# EAGLE board Avalon16 (EAGLE 6.3)

Size 160 x 100 mm. Coordinates in mm from the lower left corner, seen from the top.
Outline: 0,0 160,0 160,100 0,100 0,0
Copper layers (1*16): Top 0.035mm / dielectric 1.5mm / Bottom 0.035mm
Design rules "default": minimum track width 10mil, minimum drill 24mil, track to track 8mil, track to pad 8mil, pad to pad 8mil, via to via 8mil, smd to smd 8mil, copper to edge 40mil, drill to drill 8mil, minimum pad ring 10mil, minimum via ring 8mil, stop-mask expansion 4mil, vias tented up to drill 0mil, thermal gap 10mil

## Footprints (pad centres in the part's own frame; a part is rotated, then mirrored left to right if it is on the bottom)
C0805 = smd 1.3 x 1.5: 1 -0.95,0; 2 0.95,0
PANASONIC_F = smd 4 x 1.6: + 3.55,0; - -3.55,0
C0603 = smd 1.1 x 1: 1 -0.85,0; 2 0.85,0
0603 = drill 0: 1 -0.699,0; 2 0.699,0
0805 = drill 0: 1 -0.902,0; 2 0.902,0
1812 = drill 0: 1 -2.273,0; 2 2.273,0
1206 = drill 0: 1 -1.499,0; 2 1.499,0
0201 = drill 0: 1 -0.292,0; 2 0.292,0
SMC = smd 2.8 x 3.8: A 3.7,0; C -3.7,0
SOD80C = smd 1.4 x 1.8: A 1.7,0; C -1.7,0
FIDUCIAL = smd 1 x 1: 1 0,0
WB_GND = drill 0: 1 0,0
SO8 = smd 0.6 x 2.2: 1 -1.905,-2.6; 2 -0.635,-2.6; 3 0.635,-2.6; 4 1.905,-2.6; 5 1.905,2.6; 6 0.635,2.6; 7 -0.635,2.6; 8 -1.905,2.6
TO263-5 = smd 1.067 x 2.159: 1 -3.404,-5.791; 2 -1.702,-5.791; 3 0,-5.791; 4 1.702,-5.791; 5 3.404,-5.791 | smd 10.8 x 11.938: 6 0,3.302
SOIC20 = smd 0.61 x 2.21: 1 -5.715,-4.636; 2 -4.445,-4.636; 3 -3.175,-4.636; 4 -1.905,-4.636; 5 -0.635,-4.636; 6 0.635,-4.636; 7 1.905,-4.636; 8 3.175,-4.636; 9 4.445,-4.636; 10 5.715,-4.636; 11 5.715,4.61; 12 4.445,4.636; 13 3.175,4.636; 14 1.905,4.636; 15 0.635,4.636; 16 -0.635,4.636; 17 -1.905,4.636; 18 -3.175,4.636; 19 -4.445,4.636; 20 -5.715,4.636
SO14 = smd 0.66 x 2.032: 1 -3.81,-3.073; 2 -2.54,-3.073; 3 -1.27,-3.073; 4 0,-3.073; 5 1.27,-3.073; 6 2.54,-3.073; 7 3.81,-3.073; 8 3.81,3.073; 9 2.54,3.073; 10 1.27,3.073; 11 0,3.073; 12 -1.27,3.073; 13 -2.54,3.073; 14 -3.81,3.073
QFN48 = smd 0.9 x 0.35: 1 -3.55,2.75; 12 -3.55,-2.75; 25 3.55,-2.75; 36 3.55,2.75 | smd 1 x 0.35: 2 -3.5,2.25; 3 -3.5,1.75; 4 -3.5,1.25; 5 -3.5,0.75; 6 -3.5,0.25; 7 -3.5,-0.25; 8 -3.5,-0.75; 9 -3.5,-1.25; 10 -3.5,-1.75; 11 -3.5,-2.25; 26 3.5,-2.25; 27 3.5,-1.75; 28 3.5,-1.25; 29 3.5,-0.75; 30 3.5,-0.25; 31 3.5,0.25; 32 3.5,0.75; 33 3.5,1.25; 34 3.5,1.75; 35 3.5,2.25 | smd 0.35 x 0.9: 13 -2.75,-3.55; 24 2.75,-3.55; 37 2.75,3.55; 48 -2.75,3.55 | smd 0.35 x 1: 14 -2.25,-3.5; 15 -1.75,-3.5; 16 -1.25,-3.5; 17 -0.75,-3.5; 18 -0.25,-3.5; 19 0.25,-3.5; 20 0.75,-3.5; 21 1.25,-3.5; 22 1.75,-3.5; 23 2.25,-3.5; 38 2.25,3.5; 39 1.75,3.5; 40 1.25,3.5; 41 0.75,3.5; 42 0.25,3.5; 43 -0.25,3.5; 44 -0.75,3.5; 45 -1.25,3.5; 46 -1.75,3.5; 47 -2.25,3.5 | smd 5.4 x 5.4: EXP 0,0
WUERTH-7447709101 = smd 5.5 x 3.2: 1 0,-5; 2 0,5
L0805 = smd 1.3 x 1.5: 1 -0.95,0; 2 0.95,0
SRN8040 = drill 0: 1 -2.85,0; 2 2.85,0
SER2009 = drill 0: 1 -5.448,-4.699; 2 5.448,-4.699; 3 0,5.016
SML0805 = smd 1.2 x 1.2: A 1.05,0; C -1.05,0
7W = smd 1.8 x 2.5: 1 -2.54,-2.35; 2 2.54,-2.35; 3 2.54,2.35; 4 -2.54,2.35
SOT23 = smd 1 x 1.4: 1 -0.95,-1.1; 2 0.95,-1.1; 3 0,1.1
R0805 = smd 1.3 x 1.5: 1 -0.95,0; 2 0.95,0
0402 = drill 0: 1 -0.419,0; 2 0.419,0
0805' = smd 1.3 x 1.5: 1 -0.95,0; 2 0.95,0
TP10SQ = smd 1 x 1: TP 0,0
S-PVQFN-N16 = smd 0.508 x 0.305: 1 -1.245,0.762; 2 -1.245,0.254; 3 -1.245,-0.254; 4 -1.245,-0.762; 9 1.245,-0.762; 10 1.245,-0.254; 11 1.245,0.254; 12 1.245,0.762 | smd 0.305 x 0.508: 5 -0.762,-1.245; 6 -0.254,-1.245; 7 0.254,-1.245; 8 0.762,-1.245; 13 0.762,1.245; 14 0.254,1.245; 15 -0.254,1.245; 16 -0.762,1.245 | smd 1.702 x 1.702: 17 0,0
R-PSON-N22 = smd 1.778 x 0.305: 1 -3.2,2.489; 2 -3.2,2.007; 3 -3.2,1.499; 4 -3.2,0.991; 5 -3.2,0.508; 6 -3.2,0; 7 -3.2,-0.508; 8 -3.2,-0.991; 9 -3.2,-1.499; 10 -3.2,-2.007; 11 -3.2,-2.489; 12 3.2,-2.489; 13 3.2,-2.007; 14 3.2,-1.499; 15 3.2,-0.991; 16 3.2,-0.508; 17 3.2,0; 18 3.2,0.508; 19 3.2,0.991; 20 3.2,1.499; 21 3.2,2.007; 22 3.2,2.489 | smd 3.302 x 5.486: 23 0,0
TSSOP20 = smd 0.305 x 0.991: 1 -2.925,-2.918; 2 -2.275,-2.918; 3 -1.625,-2.918; 4 -0.975,-2.918; 5 -0.325,-2.918; 6 0.325,-2.918; 7 0.975,-2.918; 8 1.625,-2.918; 9 2.275,-2.918; 10 2.925,-2.918; 11 2.925,2.918; 12 2.275,2.918; 13 1.625,2.918; 14 0.975,2.918; 15 0.325,2.918; 16 -0.325,2.918; 17 -0.975,2.918; 18 -1.625,2.918; 19 -2.275,2.918; 20 -2.925,2.918
MOLEX-45558-0003 = drill 1.9 pad 3.2: 1 4.2,7.3; 2 0,7.3; 3 -4.2,7.3; 4 4.2,11.5; 5 0,11.5; 6 -4.2,11.5 | hole 3: -4.2,0; 4.2,0
1X06/270 = drill 1.016 long: 1 -6.35,0; 2 -3.81,0; 3 -1.27,0; 4 1.27,0; 5 3.81,0; 6 6.35,0
MOLEX-22-04-1031 = drill 1.4 pad 2.2: 1 2.5,3.2; 2 0,3.2; 3 -2.5,3.2
32005-301 = smd 3.1 x 0.5: 1 3,1.6; 2 3,0.8; 3 3,0; 4 3,-0.8; 5 3,-1.6 | smd 2.5 x 2: M1 -3,-4.45; M2 -3,4.45 | smd 3.3 x 2: M3 2.9,4.45; M4 2.9,-4.45 | hole 0.9: 0,2.2; 0,-2.2

## Placement (x,y rotation side)
C1  100n  [C0805]  -16.51,93.98 0 top  (outside the outline)
C11  100n  [C0805]  -21.59,93.98 0 top  (outside the outline)
C12  1µ  [C0805]  -107.95,93.98 0 top  (outside the outline)
C13  1000µ/6.3V/EEEFP0J102AP  [PANASONIC_F]  -57.15,58.42 0 top  (outside the outline)
C14  100n  [C0805]  -26.67,93.98 0 top  (outside the outline)
C15  100n  [C0805]  -31.75,93.98 0 top  (outside the outline)
C16  100n  [C0805]  -36.83,93.98 0 top  (outside the outline)
C17  470p  [C0805]  -41.91,93.98 0 top  (outside the outline)
C18  1µ  [C0805]  -113.03,93.98 0 top  (outside the outline)
C19  1µ  [C0805]  -118.11,93.98 0 top  (outside the outline)
C20  1µ  [C0805]  -123.19,93.98 0 top  (outside the outline)
C21  1µ  [C0805]  -15.24,100.33 0 top  (outside the outline)
C22  1µ  [C0805]  -20.32,100.33 0 top  (outside the outline)
C23  1µ  [C0805]  -25.4,100.33 0 top  (outside the outline)
C24  1µ  [C0805]  -30.48,100.33 0 top  (outside the outline)
C25  1µ  [C0805]  -35.56,100.33 0 top  (outside the outline)
C26  1µ  [C0805]  -40.64,100.33 0 top  (outside the outline)
C27  1µ  [C0805]  -45.72,100.33 0 top  (outside the outline)
C28  1µ  [C0805]  -50.8,100.33 0 top  (outside the outline)
C29  1µ  [C0805]  -55.88,100.33 0 top  (outside the outline)
C30  1µ  [C0805]  -60.96,100.33 0 top  (outside the outline)
C31  1µ  [C0805]  -66.04,100.33 0 top  (outside the outline)
C32  1µ  [C0805]  -71.12,100.33 0 top  (outside the outline)
C33  1µ  [C0805]  -76.2,100.33 0 top  (outside the outline)
C34  1µ  [C0805]  -81.28,100.33 0 top  (outside the outline)
C35  1µ  [C0805]  -86.36,100.33 0 top  (outside the outline)
C36  1µ  [C0805]  -91.44,100.33 0 top  (outside the outline)
C37  1µ  [C0805]  -96.52,100.33 0 top  (outside the outline)
C38  1µ  [C0805]  -101.6,100.33 0 top  (outside the outline)
C39  1µ  [C0805]  -106.68,100.33 0 top  (outside the outline)
C40  1µ  [C0805]  -111.76,100.33 0 top  (outside the outline)
C41  1µ  [C0805]  -116.84,100.33 0 top  (outside the outline)
C42  1µ  [C0805]  -121.92,100.33 0 top  (outside the outline)
C43  1µ  [C0805]  -15.24,106.68 0 top  (outside the outline)
C44  1µ  [C0805]  -20.32,106.68 0 top  (outside the outline)
C45  1µ  [C0805]  -25.4,106.68 0 top  (outside the outline)
C46  1µ  [C0805]  -30.48,106.68 0 top  (outside the outline)
C47  1µ  [C0805]  -35.56,106.68 0 top  (outside the outline)
C48  1µ  [C0805]  -40.64,106.68 0 top  (outside the outline)
C49  1µ  [C0805]  -45.72,106.68 0 top  (outside the outline)
C50  1µ  [C0805]  -50.8,106.68 0 top  (outside the outline)
C51  1µ  [C0805]  -55.88,106.68 0 top  (outside the outline)
C52  1µ  [C0805]  -60.96,106.68 0 top  (outside the outline)
C53  1µ  [C0805]  -66.04,106.68 0 top  (outside the outline)
C54  1µ  [C0805]  -71.12,106.68 0 top  (outside the outline)
C55  1µ  [C0805]  -76.2,106.68 0 top  (outside the outline)
C56  1µ  [C0805]  -81.28,106.68 0 top  (outside the outline)
C57  1µ  [C0805]  -86.36,106.68 0 top  (outside the outline)
C58  1µ  [C0805]  -91.44,106.68 0 top  (outside the outline)
C59  1µ  [C0805]  -96.52,106.68 0 top  (outside the outline)
C60  1µ  [C0805]  -101.6,106.68 0 top  (outside the outline)
C61  1µ  [C0805]  -106.68,106.68 0 top  (outside the outline)
C62  1µ  [C0805]  -111.76,106.68 0 top  (outside the outline)
C63  1µ  [C0805]  -116.84,106.68 0 top  (outside the outline)
C64  1µ  [C0805]  -121.92,106.68 0 top  (outside the outline)
C65  1µ  [C0805]  -15.24,113.03 0 top  (outside the outline)
C66  1µ  [C0805]  -20.32,113.03 0 top  (outside the outline)
C67  1µ  [C0805]  -25.4,113.03 0 top  (outside the outline)
C68  1µ  [C0805]  -30.48,113.03 0 top  (outside the outline)
C69  1µ  [C0805]  -35.56,113.03 0 top  (outside the outline)
C70  1µ  [C0805]  -40.64,113.03 0 top  (outside the outline)
C71  1µ  [C0805]  -45.72,113.03 0 top  (outside the outline)
C72  1µ  [C0805]  -50.8,113.03 0 top  (outside the outline)
C73  1µ  [C0805]  -55.88,113.03 0 top  (outside the outline)
C74  1µ  [C0805]  -60.96,113.03 0 top  (outside the outline)
C75  1µ  [C0805]  -66.04,113.03 0 top  (outside the outline)
C76  1µ  [C0805]  -71.12,113.03 0 top  (outside the outline)
C77  1µ  [C0805]  -76.2,113.03 0 top  (outside the outline)
C78  1µ  [C0805]  -81.28,113.03 0 top  (outside the outline)
C79  1µ  [C0805]  -86.36,113.03 0 top  (outside the outline)
C80  1µ  [C0805]  -91.44,113.03 0 top  (outside the outline)
C81  1µ  [C0805]  -96.52,113.03 0 top  (outside the outline)
C82  1µ  [C0805]  -101.6,113.03 0 top  (outside the outline)
C83  1µ  [C0805]  -106.68,113.03 0 top  (outside the outline)
C84  1µ  [C0805]  -111.76,113.03 0 top  (outside the outline)
C85  1µ  [C0805]  -116.84,113.03 0 top  (outside the outline)
C86  1µ  [C0805]  -121.92,113.03 0 top  (outside the outline)
C87  1µ  [C0805]  -15.24,119.38 0 top  (outside the outline)
C88  1µ  [C0805]  -20.32,119.38 0 top  (outside the outline)
C89  1µ  [C0805]  -25.4,119.38 0 top  (outside the outline)
C90  1µ  [C0805]  -30.48,119.38 0 top  (outside the outline)
C91  1µ  [C0805]  -35.56,119.38 0 top  (outside the outline)
C92  1µ  [C0805]  -40.64,119.38 0 top  (outside the outline)
C93  1µ  [C0805]  -45.72,119.38 0 top  (outside the outline)
C94  1µ  [C0805]  -50.8,119.38 0 top  (outside the outline)
C95  1µ  [C0805]  -55.88,119.38 0 top  (outside the outline)
C96  1µ  [C0805]  -60.96,119.38 0 top  (outside the outline)
C97  1µ  [C0805]  -66.04,119.38 0 top  (outside the outline)
C98  1µ  [C0805]  -71.12,119.38 0 top  (outside the outline)
C99  1µ  [C0805]  -76.2,119.38 0 top  (outside the outline)
C100  1µ  [C0805]  -73.66,74.93 0 top  (outside the outline)
C101  1µ  [C0805]  -80.01,74.93 0 top  (outside the outline)
C102  1µ  [C0805]  -86.36,74.93 0 top  (outside the outline)
C103  1µ  [C0805]  -92.71,74.93 0 top  (outside the outline)
C104  1µ  [C0805]  -99.06,74.93 0 top  (outside the outline)
C105  1µ  [C0805]  -105.41,74.93 0 top  (outside the outline)
C106  1µ  [C0805]  -111.76,74.93 0 top  (outside the outline)
C107  1µ  [C0805]  -118.11,74.93 0 top  (outside the outline)
C108  1µ  [C0805]  -16.51,81.28 0 top  (outside the outline)
C109  1µ  [C0805]  -22.86,81.28 0 top  (outside the outline)
C110  1µ  [C0805]  -67.31,87.63 0 top  (outside the outline)
C111  1µ  [C0805]  -123.19,87.63 0 top  (outside the outline)
C112  1µ  [C0805]  -73.66,87.63 0 top  (outside the outline)
C113  1µ  [C0805]  -80.01,87.63 0 top  (outside the outline)
C114  1µ  [C0805]  -86.36,87.63 0 top  (outside the outline)
C115  1µ  [C0805]  -92.71,87.63 0 top  (outside the outline)
C116  1µ  [C0805]  -99.06,87.63 0 top  (outside the outline)
C117  1µ  [C0805]  -105.41,87.63 0 top  (outside the outline)
C118  1µ  [C0805]  -111.76,87.63 0 top  (outside the outline)
C119  1µ  [C0805]  -118.11,87.63 0 top  (outside the outline)
C120  1µ  [C0805]  -29.21,81.28 0 top  (outside the outline)
C121  1µ  [C0805]  -35.56,81.28 0 top  (outside the outline)
C122  1µ  [C0805]  -41.91,81.28 0 top  (outside the outline)
C123  1µ  [C0805]  -48.26,81.28 0 top  (outside the outline)
C124  1µ  [C0805]  -54.61,81.28 0 top  (outside the outline)
C127  0.1µ  [C0603]  -93.98,119.38 0 top  (outside the outline)
C128  0.1µ  [C0603]  -100.33,119.38 0 top  (outside the outline)
C134  1µ  [C0805]  -60.96,81.28 0 top  (outside the outline)
C135  1µ  [C0805]  -67.31,81.28 0 top  (outside the outline)
C136  1µ  [C0805]  -73.66,81.28 0 top  (outside the outline)
C137  1µ  [C0805]  -80.01,81.28 0 top  (outside the outline)
C138  1µ  [C0805]  -86.36,81.28 0 top  (outside the outline)
C139  1µ  [C0805]  -92.71,81.28 0 top  (outside the outline)
C140  1µ  [C0805]  -99.06,81.28 0 top  (outside the outline)
C141  1µ  [C0805]  -105.41,81.28 0 top  (outside the outline)
C142  1µ  [C0805]  -111.76,81.28 0 top  (outside the outline)
C143  1µ  [C0805]  -118.11,81.28 0 top  (outside the outline)
C144  1µ  [C0805]  -16.51,87.63 0 top  (outside the outline)
C145  1µ  [C0805]  -22.86,87.63 0 top  (outside the outline)
C146  1µ  [C0805]  -29.21,87.63 0 top  (outside the outline)
C147  1µ  [C0805]  -35.56,87.63 0 top  (outside the outline)
C148  1µ  [C0805]  -41.91,87.63 0 top  (outside the outline)
C149  1µ  [C0805]  -48.26,87.63 0 top  (outside the outline)
C150  1µ  [C0805]  -54.61,87.63 0 top  (outside the outline)
C151  1µ  [C0805]  -60.96,87.63 0 top  (outside the outline)
CAC_1  1nF  [0603]  -67.31,128.27 0 top  (outside the outline)
CBST_1  100nF  [0603]  -71.12,128.27 0 top  (outside the outline)
CIN_1  10uF  [0805]  -43.18,128.27 0 top  (outside the outline)
CIN_2  22uF  [1812]  -85.09,124.46 0 top  (outside the outline)
CIN_3  22uF  [1812]  -92.71,124.46 0 top  (outside the outline)
CIN_4  22uF  [1812]  -100.33,124.46 0 top  (outside the outline)
CIN_5  22uF  [1812]  -107.95,124.46 0 top  (outside the outline)
CIN_6  10uF  [0805]  -48.26,128.27 0 top  (outside the outline)
CINX_1  100nF  [0603]  -74.93,128.27 0 top  (outside the outline)
CINX_2  100nF  [0603]  -78.74,128.27 0 top  (outside the outline)
COUT_1  22uF  [0805]  -53.34,128.27 0 top  (outside the outline)
COUT_2  100uF  [1812]  -115.57,124.46 0 top  (outside the outline)
COUT_3  100uF  [1812]  -16.51,128.27 0 top  (outside the outline)
COUT_4  100uF  [1812]  -24.13,128.27 0 top  (outside the outline)
COUT_5  100uF  [1812]  -31.75,128.27 0 top  (outside the outline)
COUT_6  22uF  [0805]  -58.42,128.27 0 top  (outside the outline)
CR_1  22nF  [0603]  -82.55,128.27 0 top  (outside the outline)
CREG_1  1uF  [1206]  -38.1,128.27 0 top  (outside the outline)
CSNUB_1  2.2nF  [0603]  -86.36,128.27 0 top  (outside the outline)
CSS_1  120pF  [0201]  -45.72,130.81 0 top  (outside the outline)
CSS_2  220pF  [0201]  -49.53,130.81 0 top  (outside the outline)
CVDD_1  4.7uF  [0805]  -63.5,128.27 0 top  (outside the outline)
D1  MBRS340T3G  [SMC]  -21.59,59.69 0 top  (outside the outline)
D2  4448  [SOD80C]  -81.28,119.38 0 top  (outside the outline)
FID1  1mm  [FIDUCIAL]  -54.61,130.81 0 top  (outside the outline)
FID2  1mm  [FIDUCIAL]  -57.15,130.81 0 top  (outside the outline)
FID3  1mm  [FIDUCIAL]  -59.69,130.81 0 top  (outside the outline)
FID4  1mm  [FIDUCIAL]  -62.23,130.81 0 top  (outside the outline)
FID5  1mm  [FIDUCIAL]  -64.77,130.81 0 top  (outside the outline)
FID6  1mm  [FIDUCIAL]  -67.31,130.81 0 top  (outside the outline)
GND93  WB_GND  [WB_GND]  -52.07,130.81 0 top  (outside the outline)
IC2  NB3L553DG  [SO8]  -48.26,44.45 0 top  (outside the outline)
IC3  LM2576S-3.3  [TO263-5]  -58.42,7.62 0 top  (outside the outline)
IC4  PIC16LF1459  [SOIC20]  -93.98,45.72 0 top  (outside the outline)
IC5  74HC02D  [SO14]  -33.02,58.42 0 top  (outside the outline)
IC6  A3255Q48  [QFN48]  -19.05,33.02 0 top  (outside the outline)
IC7  A3255Q48  [QFN48]  -29.21,33.02 0 top  (outside the outline)
IC8  A3255Q48  [QFN48]  -39.37,33.02 0 top  (outside the outline)
IC9  A3255Q48  [QFN48]  -49.53,33.02 0 top  (outside the outline)
IC10  A3255Q48  [QFN48]  -59.69,33.02 0 top  (outside the outline)
IC11  A3255Q48  [QFN48]  -69.85,33.02 0 top  (outside the outline)
IC12  A3255Q48  [QFN48]  -80.01,33.02 0 top  (outside the outline)
IC13  A3255Q48  [QFN48]  -90.17,33.02 0 top  (outside the outline)
IC14  A3255Q48  [QFN48]  -100.33,33.02 0 top  (outside the outline)
IC15  A3255Q48  [QFN48]  -110.49,33.02 0 top  (outside the outline)
IC16  A3255Q48  [QFN48]  -120.65,33.02 0 top  (outside the outline)
IC17  A3255Q48  [QFN48]  -19.05,46.99 0 top  (outside the outline)
IC19  A3255Q48  [QFN48]  -29.21,46.99 0 top  (outside the outline)
IC20  A3255Q48  [QFN48]  -39.37,46.99 0 top  (outside the outline)
L1  100µ / Würth 7447709101  [WUERTH-7447709101]  -21.59,7.62 0 top  (outside the outline)
L2  100µ  [L0805]  -111.76,57.15 0 top  (outside the outline)
L3  100µ  [L0805]  -118.11,57.15 0 top  (outside the outline)
L4  100µ  [L0805]  -17.78,68.58 0 top  (outside the outline)
L5  100µ  [L0805]  -24.13,68.58 0 top  (outside the outline)
L6  100µ  [L0805]  -30.48,68.58 0 top  (outside the outline)
L7  100µ  [L0805]  -36.83,68.58 0 top  (outside the outline)
L8  100µ  [L0805]  -43.18,68.58 0 top  (outside the outline)
L9  100µ  [L0805]  -49.53,68.58 0 top  (outside the outline)
L10  100µ  [L0805]  -55.88,68.58 0 top  (outside the outline)
L11  100µ  [L0805]  -62.23,68.58 0 top  (outside the outline)
L12  100µ  [L0805]  -68.58,68.58 0 top  (outside the outline)
L13  100µ  [L0805]  -74.93,68.58 0 top  (outside the outline)
L14  2.2uH  [SRN8040]  -68.58,124.46 0 top  (outside the outline)
L15  100µ  [L0805]  -81.28,68.58 0 top  (outside the outline)
L16  100µ  [L0805]  -87.63,68.58 0 top  (outside the outline)
L17  500nH  [SER2009]  -59.69,45.72 0 top  (outside the outline)
L18  2.2uH  [SRN8040]  -77.47,124.46 0 top  (outside the outline)
LED1  green  [SML0805]  -87.63,119.38 0 top  (outside the outline)
Q1  7W-25-000MBB-T  [7W]  -78.74,45.72 0 top  (outside the outline)
Q2  IRFML8244TRPBF  [SOT23]  -87.63,58.42 0 top  (outside the outline)
R4  10k  [R0805]  -102.87,93.98 0 top  (outside the outline)
R5  390  [R0805]  -77.47,93.98 0 top  (outside the outline)
R6  390  [R0805]  -82.55,93.98 0 top  (outside the outline)
R7  100  [R0805]  -87.63,93.98 0 top  (outside the outline)
R8  100  [R0805]  -92.71,93.98 0 top  (outside the outline)
R9  100  [R0805]  -97.79,93.98 0 top  (outside the outline)
R10  10k  [R0805]  -52.07,93.98 0 top  (outside the outline)
R11  10k  [R0805]  -72.39,93.98 0 top  (outside the outline)
R12  100  [R0805]  -57.15,93.98 0 top  (outside the outline)
R13  10k  [R0805]  -62.23,93.98 0 top  (outside the outline)
R14  1k  [R0805]  -67.31,93.98 0 top  (outside the outline)
R15  100k  [R0805]  -93.98,68.58 0 top  (outside the outline)
R16  100k  [R0805]  -100.33,68.58 0 top  (outside the outline)
R17  100k  [R0805]  -106.68,68.58 0 top  (outside the outline)
R18  100k  [R0805]  -113.03,68.58 0 top  (outside the outline)
R19  100k  [R0805]  -119.38,68.58 0 top  (outside the outline)
R20  100k  [R0805]  -16.51,74.93 0 top  (outside the outline)
R21  100k  [R0805]  -22.86,74.93 0 top  (outside the outline)
R22  100k  [R0805]  -29.21,74.93 0 top  (outside the outline)
R23  100k  [R0805]  -35.56,74.93 0 top  (outside the outline)
R24  100k  [R0805]  -41.91,74.93 0 top  (outside the outline)
R25  100k  [R0805]  -48.26,74.93 0 top  (outside the outline)
R26  100k  [R0805]  -54.61,74.93 0 top  (outside the outline)
R28  100k  [R0805]  -60.96,74.93 0 top  (outside the outline)
R29  100k  [R0805]  -67.31,74.93 0 top  (outside the outline)
RBST_1  2.05  [0402]  -93.98,128.27 0 top  (outside the outline)
RENABLE_1  1k  [0402]  -97.79,128.27 0 top  (outside the outline)
RENB_1  100k  [0402]  -101.6,128.27 0 top  (outside the outline)
RENT_1  200k  [0402]  -105.41,128.27 0 top  (outside the outline)
RFB1  200k  [0402]  -109.22,128.27 0 top  (outside the outline)
RFB2  24.9k  [0402]  -113.03,128.27 0 top  (outside the outline)
RFB3  150k  [0402]  -116.84,128.27 0 top  (outside the outline)
RFB4  187k  [0402]  -120.65,128.27 0 top  (outside the outline)
RFBB_1  10k  [0402]  -15.24,130.81 0 top  (outside the outline)
RFBT_1  2.49k  [0402]  -19.05,130.81 0 top  (outside the outline)
RPG_1  100k  [0402]  -26.67,130.81 0 top  (outside the outline)
RPG_2  100k  [0402]  -30.48,130.81 0 top  (outside the outline)
RPGOOD_1  100k  [0402]  -22.86,130.81 0 top  (outside the outline)
RR_1  66.5k  [0402]  -34.29,130.81 0 top  (outside the outline)
RSNUB_1  3  [0402]  -38.1,130.81 0 top  (outside the outline)
RSS_1  39k  [0603]  -90.17,128.27 0 top  (outside the outline)
RT1  2k2  [0805']  -46.99,93.98 0 top  (outside the outline)
RTRIP_1  180k  [0402]  -41.91,130.81 0 top  (outside the outline)
TP2  TPSQTP10SQ  [TP10SQ]  -105.41,118.11 0 top  (outside the outline)
TP3  TPSQTP10SQ  [TP10SQ]  -110.49,118.11 0 top  (outside the outline)
TP4  TPSQTP10SQ  [TP10SQ]  -115.57,118.11 0 top  (outside the outline)
TP5  TPSQTP10SQ  [TP10SQ]  -120.65,118.11 0 top  (outside the outline)
TP6  TPSQTP10SQ  [TP10SQ]  -16.51,124.46 0 top  (outside the outline)
TP7  TPSQTP10SQ  [TP10SQ]  -21.59,124.46 0 top  (outside the outline)
TP8  TPSQTP10SQ  [TP10SQ]  -26.67,124.46 0 top  (outside the outline)
TP9  TPSQTP10SQ  [TP10SQ]  -31.75,124.46 0 top  (outside the outline)
U1  TPS62130RGTR  [S-PVQFN-N16]  -44.45,124.46 0 top  (outside the outline)
U2  TPS53355DQPR  [R-PSON-N22]  -101.6,57.15 0 top  (outside the outline)
U3  TPS62130RGTR  [S-PVQFN-N16]  -59.69,124.46 0 top  (outside the outline)
U$1  GTL2003  [TSSOP20]  -68.58,58.42 0 top  (outside the outline)
X1  Molex 45558-0003  [MOLEX-45558-0003]  -40.64,7.62 0 top  (outside the outline)
X2  ISP  [1X06/270]  -107.95,11.43 0 top  (outside the outline)
X3  Molex 22-04-1031  [MOLEX-22-04-1031]  -114.3,43.18 0 top  (outside the outline)
X4  Würth 65100516121 / TE 1734035-2  [32005-301]  -91.44,7.62 0 top  (outside the outline)

## Library data of the parts
C1 C11-C124 C134-C151 L2-L13 L15 L16 R4-R26 R28 R29 = rcl
C127 C128 = rcl (2)
CAC_1 = AcceleratedDesigns_Lib; CAP: 1.0E-9; ESR: 0.0; IRMS: 0.0; MANUFACTURER_NAME: Kemet; MANUFACTURER_PART_NUMBER: C0603C102J5GAC; VDC: 50.0; VENDOR: Kemet
CBST_1 = AcceleratedDesigns_Lib; CAP: 1.0E-7; ESR: 0.0; IRMS: 0.0; MANUFACTURER_NAME: Kemet; MANUFACTURER_PART_NUMBER: C0603C104K5RACTU; VDC: 50.0; VENDOR: Kemet
CIN_1 CIN_6 = AcceleratedDesigns_Lib; CAP: 1.0E-5; DATASHEET_URL: http://murata.com; ESR: 0.0; IRMS: 0.0; MANUFACTURER_NAME: MuRata; MANUFACTURER_PART_NUMBER: GRM219R61E106KA12; VDC: 25.0; VENDOR: Nichicon
CIN_2-CIN_5 = AcceleratedDesigns_Lib; CAP: 2.2E-5; ESR: 0.0019; IRMS: 3.6; MANUFACTURER_NAME: TDK; MANUFACTURER_PART_NUMBER: C4532X7R1C226M; VDC: 16.0; VENDOR: TDK
CINX_1 CINX_2 = AcceleratedDesigns_Lib; CAP: 1.0E-7; ESR: 0.0; IRMS: 0.0; MANUFACTURER_NAME: Kemet; MANUFACTURER_PART_NUMBER: C0603C104K3RACTU; VDC: 25.0; VENDOR: Kemet
COUT_1 COUT_6 = AcceleratedDesigns_Lib; CAP: 2.2E-5; ESR: 0.0018; IRMS: 0.0; MANUFACTURER_NAME: TDK; MANUFACTURER_PART_NUMBER: C2012X5R0J226M; VDC: 6.3; VENDOR: TDK
COUT_2-COUT_5 = AcceleratedDesigns_Lib; CAP: 1.0E-4; ESR: 0.0012; IRMS: 4.6; MANUFACTURER_NAME: TDK; MANUFACTURER_PART_NUMBER: C4532X5R0J107M; VDC: 6.3; VENDOR: TDK
CR_1 = AcceleratedDesigns_Lib; CAP: 2.2E-8; ESR: 0.0; IRMS: 0.0; MANUFACTURER_NAME: Kemet; MANUFACTURER_PART_NUMBER: C0603C223K5RACTU; VDC: 50.0; VENDOR: Kemet
CREG_1 = AcceleratedDesigns_Lib; CAP: 1.0E-6; ESR: 0.0; IRMS: 0.0; MANUFACTURER_NAME: MuRata; MANUFACTURER_PART_NUMBER: GRM31MR71H105KA88L; VDC: 50.0; VENDOR: MuRata
CSNUB_1 = AcceleratedDesigns_Lib; CAP: 2.2E-9; ESR: 0.0; IRMS: 0.0; MANUFACTURER_NAME: Kemet; MANUFACTURER_PART_NUMBER: C0603C222K5RAC; VDC: 50.0; VENDOR: Kemet
CSS_1 = AcceleratedDesigns_Lib; CAP: 1.2E-10; ESR: 0.0; IRMS: 0.0; MANUFACTURER_NAME: MuRata; MANUFACTURER_PART_NUMBER: GRM033R71E121KA01D; VDC: 25.0; VENDOR: MuRata
CSS_2 = AcceleratedDesigns_Lib; CAP: 2.2E-10; ESR: 0.0; IRMS: 0.0; MANUFACTURER_NAME: MuRata; MANUFACTURER_PART_NUMBER: GRM033R71E221KA01D; VDC: 25.0; VENDOR: MuRata
CVDD_1 = AcceleratedDesigns_Lib; CAP: 4.7E-6; ESR: 0.0; IRMS: 0.0; MANUFACTURER_NAME: MuRata; MANUFACTURER_PART_NUMBER: GRM21BC81E475KA12L; VDC: 25.0; VENDOR: MuRata
D1 D2 = diode
FID1-FID6 = fiducial
GND93 = AcceleratedDesigns_Lib; MANUFACTURER_NAME: WB_GND; MANUFACTURER_PART_NUMBER: WB_GND; POWERPORTTYPE: POWER_GROUND; VALUE: Value
IC2 = NB3L553
IC3 = linear
IC4 = PIC16LF1459
IC5 = 74xx-eu
IC6-IC17 IC19 IC20 = Avalon
L1 = Wuerth-7447709101
L14 L18 = AcceleratedDesigns_Lib; DATASHEET_URL: http://www.bourns.com/data/global/pdfs/SRN8040.pdf; DCR: 0.013; IDC: 6.3; L: 2.2E-6; MANUFACTURER_NAME: Bourns; MANUFACTURER_PART_NUMBER: SRN8040-2R2Y; VENDOR: Bourns
L17 = AcceleratedDesigns_Lib; DATASHEET_URL: http://www.coilcraft.com/pdfs/ser2000.pdf; DCR: 6.3E-4; IDC: 54.0; L: 5.0E-7; MANUFACTURER_NAME: Coilcraft; MANUFACTURER_PART_NUMBER: SER2009-501MLB; VENDOR: Coilcraft
LED1 = led
Q1 = Osc-7W
Q2 = transistor-small-signal
RBST_1 = AcceleratedDesigns_Lib; MANUFACTURER_NAME: Vishay-Dale; MANUFACTURER_PART_NUMBER: CRCW04022R05FKED; POWER: 0.063; RESISTANCE: 2.05; TOLERANCE: 1.0; VENDOR: Vishay-Dale
RENABLE_1 = AcceleratedDesigns_Lib; MANUFACTURER_NAME: Vishay-Dale; MANUFACTURER_PART_NUMBER: CRCW04021K00FKED; POWER: 0.063; RESISTANCE: 1000.0; TOLERANCE: 1.0; VENDOR: Vishay-Dale
RENB_1 RPG_1 RPG_2 RPGOOD_1 = AcceleratedDesigns_Lib; MANUFACTURER_NAME: Vishay-Dale; MANUFACTURER_PART_NUMBER: CRCW0402100KFKED; POWER: 0.063; RESISTANCE: 100000.0; TOLERANCE: 1.0; VENDOR: Vishay-Dale
RENT_1 RFB1 = AcceleratedDesigns_Lib; MANUFACTURER_NAME: Vishay-Dale; MANUFACTURER_PART_NUMBER: CRCW0402200KFKED; POWER: 0.063; RESISTANCE: 200000.0; TOLERANCE: 1.0; VENDOR: Vishay-Dale
RFB2 = AcceleratedDesigns_Lib; MANUFACTURER_NAME: Vishay-Dale; MANUFACTURER_PART_NUMBER: CRCW040224K9FKED; POWER: 0.063; RESISTANCE: 24900.0; TOLERANCE: 1.0; VENDOR: Vishay-Dale
RFB3 = AcceleratedDesigns_Lib; MANUFACTURER_NAME: Vishay-Dale; MANUFACTURER_PART_NUMBER: CRCW0402150KFKED; POWER: 0.063; RESISTANCE: 150000.0; TOLERANCE: 1.0; VENDOR: Vishay-Dale
RFB4 = AcceleratedDesigns_Lib; MANUFACTURER_NAME: Vishay-Dale; MANUFACTURER_PART_NUMBER: CRCW0402187KFKED; POWER: 0.063; RESISTANCE: 187000.0; TOLERANCE: 1.0; VENDOR: Vishay-Dale
RFBB_1 = AcceleratedDesigns_Lib; MANUFACTURER_NAME: Vishay-Dale; MANUFACTURER_PART_NUMBER: CRCW040210K0FKED; POWER: 0.063; RESISTANCE: 10000.0; TOLERANCE: 1.0; VENDOR: Vishay-Dale
RFBT_1 = AcceleratedDesigns_Lib; MANUFACTURER_NAME: Vishay-Dale; MANUFACTURER_PART_NUMBER: CRCW04022K49FKED; POWER: 0.063; RESISTANCE: 2490.0; TOLERANCE: 1.0; VENDOR: Vishay-Dale
RR_1 = AcceleratedDesigns_Lib; MANUFACTURER_NAME: Vishay-Dale; MANUFACTURER_PART_NUMBER: CRCW040266K5FKED; POWER: 0.063; RESISTANCE: 66500.0; TOLERANCE: 1.0; VENDOR: Vishay-Dale
RSNUB_1 = AcceleratedDesigns_Lib; MANUFACTURER_NAME: Vishay-Dale; MANUFACTURER_PART_NUMBER: CRCW04023R00JNED; POWER: 0.063; RESISTANCE: 3.0; TOLERANCE: 5.0; VENDOR: Vishay-Dale
RSS_1 = AcceleratedDesigns_Lib; MANUFACTURER_NAME: Vishay-Dale; MANUFACTURER_PART_NUMBER: CRCW060339K0JNEA; POWER: 0.1; RESISTANCE: 39000.0; TOLERANCE: 5.0; VENDOR: Vishay-Dale
RT1 = NTC
RTRIP_1 = AcceleratedDesigns_Lib; MANUFACTURER_NAME: Vishay-Dale; MANUFACTURER_PART_NUMBER: CRCW0402180KJNED; POWER: 0.063; RESISTANCE: 180000.0; TOLERANCE: 5.0; VENDOR: Vishay-Dale
TP2-TP9 = testpad
U1 U3 = TPS62130RGTR; DATASHEETURL: http://www.ti.com/product/tps62130; FREQUENCY: 2500000.0; IMAX: 3.0; MANUFACTURER_NAME: Texas Instruments; MANUFACTURER_PART_NUMBER: TPS62130RGTR; MKTG_PACKAGE: RGT; NSID: TPS62130RGTR; PACKAGE: RGT; VENDOR: Texas Instruments
U2 = myTi_Power; DATASHEETURL: http://www.ti.com/product/TPS53355; FREQUENCY: 300000.0; IMAX: 30.0; MANUFACTURER_NAME: Texas Instruments; MANUFACTURER_PART_NUMBER: TPS53355DQPR; MKTG_PACKAGE: TPS53355; NSID: TPS53355DQPR; PACKAGE: TPS53355; VENDOR: Texas Instruments
U$1 = GTL2003
X1 X3 = Molex-ATX-PCIe
X2 = pinhead
X4 = con-cypressindustries; OC_FARNELL: unknown; OC_NEWARK: unknown

## Nets
1: CSS_1.2 U1.9
3: RFB1.2 RFB2.2 U1.5
4: L14.1 U1.1 U1.2 U1.3
6: RPG_1.2 U1.4
7: CAC_1.2 RFBB_1.1 RFBT_1.2 U2.1
10: CAC_1.1 CR_1.2 RR_1.1
11: CBST_1.2 RBST_1.1
13: CREG_1.1 RPGOOD_1.2 U2.18
14: CSNUB_1.1 RSNUB_1.2
15: RBST_1.2 U2.4
16: RENABLE_1.2 RENB_1.1 RENT_1.1
17: RENABLE_1.1 U2.2
18: RPGOOD_1.1 U2.3
19: RSS_1.1 U2.20
20: RTRIP_1.2 U2.21
24: CSS_2.2 U3.9
25: L18.1 U3.1 U3.2 U3.3
26: RFB3.2 RFB4.2 U3.5
27: RPG_2.2 U3.4
!MCLR: IC4.4 R7.1 X2.1
!RESET1: C26.2 IC6.44 R15.2
!RESET2: C27.2 IC7.44 R16.2
!RESET3: C36.2 IC8.44 R17.2
!RESET4: C45.2 IC9.44 R18.2
!RESET5: C54.2 IC10.44 R19.2
!RESET6: C63.2 IC11.44 R20.2
!RESET7: C72.2 IC12.44 R21.2
!RESET8: C81.2 IC13.44 R22.2
!RESET9: C90.2 IC14.44 R23.2
!RESET10: C99.2 IC15.44 R24.2
!RESET11: C12.2 IC16.44 R25.2
!RESET12: C116.2 IC17.44 R26.2
!RESET14: C134.2 IC19.44 R28.2
!RESET15: C143.2 IC20.44 R29.2
+0V9: COUT_1.1 IC8.7 IC9.7 IC10.7 IC12.7 IC13.7 IC14.7 IC15.7 IC16.7 IC17.7 IC19.7 IC20.7 L14.2 RFB2.1 RPG_1.1 U1.7 U1.14
+1V8: C127.2 COUT_6.1 IC6.24 IC6.37 IC7.24 IC7.37 IC8.24 IC8.37 IC9.24 IC9.37 IC10.24 IC10.37 IC11.24 IC11.37 IC12.24 IC12.37 IC13.24 IC13.37 IC14.24 IC14.37 IC15.24 IC15.37 IC16.24 IC16.37 IC17.24 IC17.37 IC19.24 IC19.37 IC20.24 IC20.37 L2.1 L3.1 L4.1 L5.1 L6.1 L7.1 L8.1 L9.1 L10.1 L11.1 L12.1 L13.1 L15.1 L16.1 L18.2 R15.1 R16.1 R17.1 R18.1 R19.1 R20.1 R21.1 R22.1 R23.1 R24.1 R25.1 R26.1 R28.1 R29.1 RFB4.1 RPG_2.1 U3.7 U3.14 U$1.2
+3V3: C1.2 C11.2 C13.+ C14.2 C15.2 C23.2 C24.2 C34.2 C35.2 C43.2 C44.2 C52.2 C53.2 C61.2 C62.2 C70.2 C71.2 C79.2 C80.2 C88.2 C89.2 C97.2 C98.2 C106.2 C107.2 C114.2 C115.2 C123.2 C124.2 C128.2 C141.2 C142.2 C150.2 C151.2 IC2.1 IC2.8 IC3.4 IC4.1 IC5.14 L1.2 Q1.4 R4.1 R5.1 R6.1 R10.1 R11.1 RT1.2 TP6.TP U$1.19 U$1.20 X2.2
+12V: CIN_1.1 CIN_2.1 CIN_3.1 CIN_4.1 CIN_5.1 CIN_6.1 CINX_1.1 CINX_2.1 CVDD_1.1 D2.C IC3.1 RENT_1.2 U1.10 U1.11 U1.12 U1.13 U2.12 U2.13 U2.14 U2.15 U2.16 U2.17 U2.19 U3.10 U3.11 U3.12 U3.13 X1.1 X1.2 X1.3 X3.2
CLK1: IC2.2 IC6.9 IC7.9 IC8.9 IC9.9 IC10.9 IC19.9 IC20.9
CLK2: IC2.3 IC11.9 IC12.9 IC13.9 IC14.9 IC15.9 IC16.9 IC17.9
CONFIG1_1_2_N: IC6.35 IC7.2
CONFIG1_1_2_P: IC6.36 IC7.1
CONFIG1_1V8_N: IC6.2 U$1.4
CONFIG1_1V8_P: IC6.1 U$1.3
CONFIG1_2_3_N: IC7.35 IC8.2
CONFIG1_2_3_P: IC7.36 IC8.1
CONFIG1_3_4_N: IC8.35 IC9.2
CONFIG1_3_4_P: IC8.36 IC9.1
CONFIG1_4_5_N: IC9.35 IC10.2
CONFIG1_4_5_P: IC9.36 IC10.1
CONFIG1_5_6_N: IC10.35 IC19.2
CONFIG1_5_6_P: IC10.36 IC19.1
CONFIG1_6_7_N: IC19.35 IC20.2
CONFIG1_6_7_P: IC19.36 IC20.1
CONFIG1_N: IC4.8 U$1.17
CONFIG1_P: IC4.9 U$1.18
CONFIG2_1_2_N: IC11.35 IC12.2
CONFIG2_1_2_P: IC11.36 IC12.1
CONFIG2_1V8_N: IC11.2 U$1.6
CONFIG2_1V8_P: IC11.1 U$1.5
CONFIG2_2_3_N: IC12.35 IC13.2
CONFIG2_2_3_P: IC12.36 IC13.1
CONFIG2_3_4_N: IC13.35 IC14.2
CONFIG2_3_4_P: IC13.36 IC14.1
CONFIG2_4_5_N: IC14.35 IC15.2
CONFIG2_4_5_P: IC14.36 IC15.1
CONFIG2_5_6_N: IC15.35 IC16.2
CONFIG2_5_6_P: IC15.36 IC16.1
CONFIG2_6_7_N: IC16.35 IC17.2
CONFIG2_6_7_P: IC16.36 IC17.1
CONFIG2_N: IC4.7 U$1.15
CONFIG2_P: IC4.6 U$1.16
DVDD: C18.2 C19.2 C20.2 C21.2 C22.2 C29.2 C30.2 C31.2 C32.2 C33.2 C38.2 C39.2 C40.2 C41.2 C42.2 C47.2 C48.2 C49.2 C50.2 C51.2 C56.2 C57.2 C58.2 C59.2 C60.2 C65.2 C66.2 C67.2 C68.2 C69.2 C74.2 C75.2 C76.2 C77.2 C78.2 C83.2 C84.2 C85.2 C86.2 C87.2 C92.2 C93.2 C94.2 C95.2 C96.2 C101.2 C102.2 C103.2 C104.2 C105.2 C109.2 C110.2 C111.2 C112.2 C113.2 C118.2 C119.2 C120.2 C121.2 C122.2 C136.2 C137.2 C138.2 C139.2 C140.2 C145.2 C146.2 C147.2 C148.2 C149.2 CBST_1.1 COUT_2.1 COUT_3.1 COUT_4.1 COUT_5.1 CR_1.1 CSNUB_1.2 IC6.3 IC6.4 IC6.10 IC6.11 IC6.13 IC6.14 IC6.15 IC6.18 IC6.19 IC6.20 IC6.21 IC6.22 IC6.25 IC6.26 IC6.28 IC6.29 IC6.30 IC6.31 IC6.32 IC6.33 IC6.34 IC6.39 IC6.40 IC6.41 IC6.42 IC6.45 IC6.46 IC6.47 IC6.48 IC7.3 IC7.4 IC7.10 IC7.11 IC7.13 IC7.14 IC7.15 IC7.18 IC7.19 IC7.20 IC7.21 IC7.22 IC7.25 IC7.26 IC7.28 IC7.29 IC7.30 IC7.31 IC7.32 IC7.33 IC7.34 IC7.39 IC7.40 IC7.41 IC7.42 IC7.45 IC7.46 IC7.47 IC7.48 IC8.3 IC8.4 IC8.10 IC8.11 IC8.13 IC8.14 IC8.15 IC8.18 IC8.19 IC8.20 IC8.21 IC8.22 IC8.25 IC8.26 IC8.28 IC8.29 IC8.30 IC8.31 IC8.32 IC8.33 IC8.34 IC8.39 IC8.40 IC8.41 IC8.42 IC8.45 IC8.46 IC8.47 IC8.48 IC9.3 IC9.4 IC9.10 IC9.11 IC9.13 IC9.14 IC9.15 IC9.18 IC9.19 IC9.20 IC9.21 IC9.22 IC9.25 IC9.26 IC9.28 IC9.29 IC9.30 IC9.31 IC9.32 IC9.33 IC9.34 IC9.39 IC9.40 IC9.41 IC9.42 IC9.45 IC9.46 IC9.47 IC9.48 IC10.3 IC10.4 IC10.10 IC10.11 IC10.13 IC10.14 IC10.15 IC10.18 IC10.19 IC10.20 IC10.21 IC10.22 IC10.25 IC10.26 IC10.28 IC10.29 IC10.30 IC10.31 IC10.32 IC10.33 IC10.34 IC10.39 IC10.40 IC10.41 IC10.42 IC10.45 IC10.46 IC10.47 IC10.48 IC11.3 IC11.4 IC11.10 IC11.11 IC11.13 IC11.14 IC11.15 IC11.18 IC11.19 IC11.20 IC11.21 IC11.22 IC11.25 IC11.26 IC11.28 IC11.29 IC11.30 IC11.31 IC11.32 IC11.33 IC11.34 IC11.39 IC11.40 IC11.41 IC11.42 IC11.45 IC11.46 IC11.47 IC11.48 IC12.3 IC12.4 IC12.10 IC12.11 IC12.13 IC12.14 IC12.15 IC12.18 IC12.19 IC12.20 IC12.21 IC12.22 IC12.25 IC12.26 IC12.28 IC12.29 IC12.30 IC12.31 IC12.32 IC12.33 IC12.34 IC12.39 IC12.40 IC12.41 IC12.42 IC12.45 IC12.46 IC12.47 IC12.48 IC13.3 IC13.4 IC13.10 IC13.11 IC13.13 IC13.14 IC13.15 IC13.18 IC13.19 IC13.20 IC13.21 IC13.22 IC13.25 IC13.26 IC13.28 IC13.29 IC13.30 IC13.31 IC13.32 IC13.33 IC13.34 IC13.39 IC13.40 IC13.41 IC13.42 IC13.45 IC13.46 IC13.47 IC13.48 IC14.3 IC14.4 IC14.10 IC14.11 IC14.13 IC14.14 IC14.15 IC14.18 IC14.19 IC14.20 IC14.21 IC14.22 IC14.25 IC14.26 IC14.28 IC14.29 IC14.30 IC14.31 IC14.32 IC14.33 IC14.34 IC14.39 IC14.40 IC14.41 IC14.42 IC14.45 IC14.46 IC14.47 IC14.48 IC15.3 IC15.4 IC15.10 IC15.11 IC15.13 IC15.14 IC15.15 IC15.18 IC15.19 IC15.20 IC15.21 IC15.22 IC15.25 IC15.26 IC15.28 IC15.29 IC15.30 IC15.31 IC15.32 IC15.33 IC15.34 IC15.39 IC15.40 IC15.41 IC15.42 IC15.45 IC15.46 IC15.47 IC15.48 IC16.3 IC16.4 IC16.10 IC16.11 IC16.13 IC16.14 IC16.15 IC16.18 IC16.19 IC16.20 IC16.21 IC16.22 IC16.25 IC16.26 IC16.28 IC16.29 IC16.30 IC16.31 IC16.32 IC16.33 IC16.34 IC16.39 IC16.40 IC16.41 IC16.42 IC16.45 IC16.46 IC16.47 IC16.48 IC17.3 IC17.4 IC17.10 IC17.11 IC17.13 IC17.14 IC17.15 IC17.18 IC17.19 IC17.20 IC17.21 IC17.22 IC17.25 IC17.26 IC17.28 IC17.29 IC17.30 IC17.31 IC17.32 IC17.33 IC17.34 IC17.39 IC17.40 IC17.41 IC17.42 IC17.45 IC17.46 IC17.47 IC17.48 IC19.3 IC19.4 IC19.10 IC19.11 IC19.13 IC19.14 IC19.15 IC19.18 IC19.19 IC19.20 IC19.21 IC19.22 IC19.25 IC19.26 IC19.28 IC19.29 IC19.30 IC19.31 IC19.32 IC19.33 IC19.34 IC19.39 IC19.40 IC19.41 IC19.42 IC19.45 IC19.46 IC19.47 IC19.48 IC20.3 IC20.4 IC20.10 IC20.11 IC20.13 IC20.14 IC20.15 IC20.18 IC20.19 IC20.20 IC20.21 IC20.22 IC20.25 IC20.26 IC20.28 IC20.29 IC20.30 IC20.31 IC20.32 IC20.33 IC20.34 IC20.39 IC20.40 IC20.41 IC20.42 IC20.45 IC20.46 IC20.47 IC20.48 L17.1 L17.2 RFBT_1.1 RR_1.2 U2.6 U2.7 U2.8 U2.9 U2.10 U2.11
FAN_PWM: IC4.5 R12.1
GND: C1.1 C11.1 C12.1 C13.- C14.1 C15.1 C16.1 C17.1 C18.1 C19.1 C20.1 C21.1 C22.1 C23.1 C24.1 C25.2 C26.1 C27.1 C28.2 C29.1 C30.1 C31.1 C32.1 C33.1 C34.1 C35.1 C36.1 C37.2 C38.1 C39.1 C40.1 C41.1 C42.1 C43.1 C44.1 C45.1 C46.2 C47.1 C48.1 C49.1 C50.1 C51.1 C52.1 C53.1 C54.1 C55.2 C56.1 C57.1 C58.1 C59.1 C60.1 C61.1 C62.1 C63.1 C64.2 C65.1 C66.1 C67.1 C68.1 C69.1 C70.1 C71.1 C72.1 C73.2 C74.1 C75.1 C76.1 C77.1 C78.1 C79.1 C80.1 C81.1 C82.2 C83.1 C84.1 C85.1 C86.1 C87.1 C88.1 C89.1 C90.1 C91.2 C92.1 C93.1 C94.1 C95.1 C96.1 C97.1 C98.1 C99.1 C100.2 C101.1 C102.1 C103.1 C104.1 C105.1 C106.1 C107.1 C108.2 C109.1 C110.1 C111.1 C112.1 C113.1 C114.1 C115.1 C116.1 C117.2 C118.1 C119.1 C120.1 C121.1 C122.1 C123.1 C124.1 C127.1 C128.1 C134.1 C135.2 C136.1 C137.1 C138.1 C139.1 C140.1 C141.1 C142.1 C143.1 C144.2 C145.1 C146.1 C147.1 C148.1 C149.1 C150.1 C151.1 CIN_1.2 CIN_2.2 CIN_3.2 CIN_4.2 CIN_5.2 CIN_6.2 CINX_1.2 CINX_2.2 COUT_1.2 COUT_2.2 COUT_3.2 COUT_4.2 COUT_5.2 COUT_6.2 CREG_1.2 CSS_1.1 CSS_2.1 CVDD_1.2 D1.A GND93.1 IC2.4 IC3.3 IC3.5 IC3.6 IC4.20 IC5.7 IC6.5 IC6.8 IC6.12 IC6.23 IC6.27 IC6.38 IC6.EXP IC7.5 IC7.8 IC7.12 IC7.23 IC7.27 IC7.38 IC7.EXP IC8.5 IC8.8 IC8.12 IC8.23 IC8.27 IC8.38 IC8.EXP IC9.5 IC9.8 IC9.12 IC9.23 IC9.27 IC9.38 IC9.EXP IC10.5 IC10.8 IC10.12 IC10.23 IC10.27 IC10.38 IC10.EXP IC11.5 IC11.8 IC11.12 IC11.23 IC11.27 IC11.38 IC11.EXP IC12.5 IC12.8 IC12.12 IC12.23 IC12.27 IC12.38 IC12.EXP IC13.5 IC13.8 IC13.12 IC13.23 IC13.27 IC13.38 IC13.EXP IC14.5 IC14.8 IC14.12 IC14.23 IC14.27 IC14.38 IC14.EXP IC15.5 IC15.8 IC15.12 IC15.23 IC15.27 IC15.38 IC15.EXP IC16.5 IC16.8 IC16.12 IC16.23 IC16.27 IC16.38 IC16.EXP IC17.5 IC17.8 IC17.12 IC17.23 IC17.27 IC17.38 IC17.EXP IC19.5 IC19.8 IC19.12 IC19.23 IC19.27 IC19.38 IC19.EXP IC20.5 IC20.8 IC20.12 IC20.23 IC20.27 IC20.38 IC20.EXP LED1.C Q1.2 Q2.2 R13.2 R14.2 RENB_1.2 RFB1.1 RFB3.1 RFBB_1.2 RSNUB_1.1 RSS_1.2 RTRIP_1.1 TP9.TP U1.6 U1.8 U1.15 U1.16 U1.17 U2.23 U3.6 U3.8 U3.15 U3.16 U3.17 U$1.1 X1.4 X1.5 X1.6 X2.3 X4.5 X4.M1 X4.M2 X4.M3 X4.M4
ICSPCLK: IC4.15 X2.5
ICSPDAT: IC4.16 X2.4
LED: IC4.2 R9.2
N$1: IC20.36 TP2.TP
N$2: IC20.35
N$3: TP4.TP
N$4: TP5.TP
N$11: U$1.12
N$12: U$1.11
N$13: U$1.9
N$14: U$1.10
N$41: C16.2 IC4.17
N$44: D1.C IC3.2 L1.1
N$45: IC2.5 Q1.3
N$46: D2.A Q2.3 X3.1
N$47: IC5.5 IC5.13 R8.1
N$48: IC5.2 IC5.3 IC5.4
N$49: Q2.1 R12.2 R13.1
N$51: C17.2 IC5.6 R8.2
N$55: R4.2 R7.2 X3.3
N$56: LED1.A R9.1
NTC: IC4.14 R14.1 RT1.1
OSC_EN: IC4.3 Q1.1
REPORT_1V8_N: IC6.16 IC7.16 IC8.16 IC9.16 IC10.16 IC11.16 IC12.16 IC13.16 IC14.16 IC15.16 IC16.16 IC17.16 IC19.16 IC20.16 U$1.8
REPORT_1V8_P: IC6.17 IC7.17 IC8.17 IC9.17 IC10.17 IC11.17 IC12.17 IC13.17 IC14.17 IC15.17 IC16.17 IC17.17 IC19.17 IC20.17 U$1.7
REPORT_CLK: IC4.10 IC5.1
REPORT_DATA: IC4.12 IC5.10
REPORT_N: IC5.8 IC5.9 IC5.12 R6.2 U$1.13
REPORT_P: IC5.11 R5.2 U$1.14
SCL: IC4.11 R11.2 TP7.TP
SDA: IC4.13 R10.2 TP8.TP
USB_DM: IC4.18 X4.2
USB_DP: IC4.19 X4.3
VDD_PLL1: C25.1 IC6.6 L2.2
VDD_PLL2: C28.1 IC7.6 L3.2
VDD_PLL3: C37.1 IC8.6 L4.2
VDD_PLL4: C46.1 IC9.6 L5.2
VDD_PLL5: C55.1 IC10.6 L6.2
VDD_PLL6: C64.1 IC11.6 L7.2
VDD_PLL7: C73.1 IC12.6 L8.2
VDD_PLL8: C82.1 IC13.6 L9.2
VDD_PLL9: C91.1 IC14.6 L10.2
VDD_PLL10: C100.1 IC15.6 L11.2
VDD_PLL11: C108.1 IC16.6 L12.2
VDD_PLL12: C117.1 IC17.6 L13.2
VDD_PLL14: C135.1 IC19.6 L15.2
VDD_PLL15: C144.1 IC20.6 L16.2

## Tracks (layer width: path | path; a pad name or v marks a point on that pad's centre or on a via)
1  (1 unrouted)
3  (2 unrouted)
4  (3 unrouted)
6  (1 unrouted)
7  (3 unrouted)
10  (2 unrouted)
11  (1 unrouted)
13  (2 unrouted)
14  (1 unrouted)
15  (1 unrouted)
16  (2 unrouted)
17  (1 unrouted)
18  (1 unrouted)
19  (1 unrouted)
20  (1 unrouted)
24  (1 unrouted)
25  (3 unrouted)
26  (2 unrouted)
27  (1 unrouted)
!MCLR  (2 unrouted)
!RESET1  (2 unrouted)
!RESET2  (2 unrouted)
!RESET3  (2 unrouted)
!RESET4  (2 unrouted)
!RESET5  (2 unrouted)
!RESET6  (2 unrouted)
!RESET7  (2 unrouted)
!RESET8  (2 unrouted)
!RESET9  (2 unrouted)
!RESET10  (2 unrouted)
!RESET11  (2 unrouted)
!RESET12  (2 unrouted)
!RESET14  (2 unrouted)
!RESET15  (2 unrouted)
+0V9  (16 unrouted)
+1V8  (63 unrouted)
+3V3  (50 unrouted)
+12V  (30 unrouted)
CLK1  (7 unrouted)
CLK2  (7 unrouted)
CONFIG1_1_2_N  (1 unrouted)
CONFIG1_1_2_P  (1 unrouted)
CONFIG1_1V8_N  (1 unrouted)
CONFIG1_1V8_P  (1 unrouted)
CONFIG1_2_3_N  (1 unrouted)
CONFIG1_2_3_P  (1 unrouted)
CONFIG1_3_4_N  (1 unrouted)
CONFIG1_3_4_P  (1 unrouted)
CONFIG1_4_5_N  (1 unrouted)
CONFIG1_4_5_P  (1 unrouted)
CONFIG1_5_6_N  (1 unrouted)
CONFIG1_5_6_P  (1 unrouted)
CONFIG1_6_7_N  (1 unrouted)
CONFIG1_6_7_P  (1 unrouted)
CONFIG1_N  (1 unrouted)
CONFIG1_P  (1 unrouted)
CONFIG2_1_2_N  (1 unrouted)
CONFIG2_1_2_P  (1 unrouted)
CONFIG2_1V8_N  (1 unrouted)
CONFIG2_1V8_P  (1 unrouted)
CONFIG2_2_3_N  (1 unrouted)
CONFIG2_2_3_P  (1 unrouted)
CONFIG2_3_4_N  (1 unrouted)
CONFIG2_3_4_P  (1 unrouted)
CONFIG2_4_5_N  (1 unrouted)
CONFIG2_4_5_P  (1 unrouted)
CONFIG2_5_6_N  (1 unrouted)
CONFIG2_5_6_P  (1 unrouted)
CONFIG2_6_7_N  (1 unrouted)
CONFIG2_6_7_P  (1 unrouted)
CONFIG2_N  (1 unrouted)
CONFIG2_P  (1 unrouted)
DVDD  (492 unrouted)
FAN_PWM  (1 unrouted)
GND  (292 unrouted)
ICSPCLK  (1 unrouted)
ICSPDAT  (1 unrouted)
LED  (1 unrouted)
N$1  (1 unrouted)
N$41  (1 unrouted)
N$44  (2 unrouted)
N$45  (1 unrouted)
N$46  (2 unrouted)
N$47  (2 unrouted)
N$48  (2 unrouted)
N$49  (2 unrouted)
N$51  (2 unrouted)
N$55  (2 unrouted)
N$56  (1 unrouted)
NTC  (2 unrouted)
OSC_EN  (1 unrouted)
REPORT_1V8_N  (14 unrouted)
REPORT_1V8_P  (14 unrouted)
REPORT_CLK  (1 unrouted)
REPORT_DATA  (1 unrouted)
REPORT_N  (4 unrouted)
REPORT_P  (2 unrouted)
SCL  (2 unrouted)
SDA  (2 unrouted)
USB_DM  (1 unrouted)
USB_DP  (1 unrouted)
VDD_PLL1  (2 unrouted)
VDD_PLL2  (2 unrouted)
VDD_PLL3  (2 unrouted)
VDD_PLL4  (2 unrouted)
VDD_PLL5  (2 unrouted)
VDD_PLL6  (2 unrouted)
VDD_PLL7  (2 unrouted)
VDD_PLL8  (2 unrouted)
VDD_PLL9  (2 unrouted)
VDD_PLL10  (2 unrouted)
VDD_PLL11  (2 unrouted)
VDD_PLL12  (2 unrouted)
VDD_PLL14  (2 unrouted)
VDD_PLL15  (2 unrouted)